# Altium PCB PCB5RECTIFIER.PcbDoc
Units mm, origin at the board's own origin, x right, y up, seen from the top; angles counter-clockwise.
Board outline 152.4 x 101.6 mm, 2 copper layers (Top Layer, Bottom Layer); 20 components, 17 nets, 40 pads, 0 vias.
Unrouted connection lines stored in the file: 33.
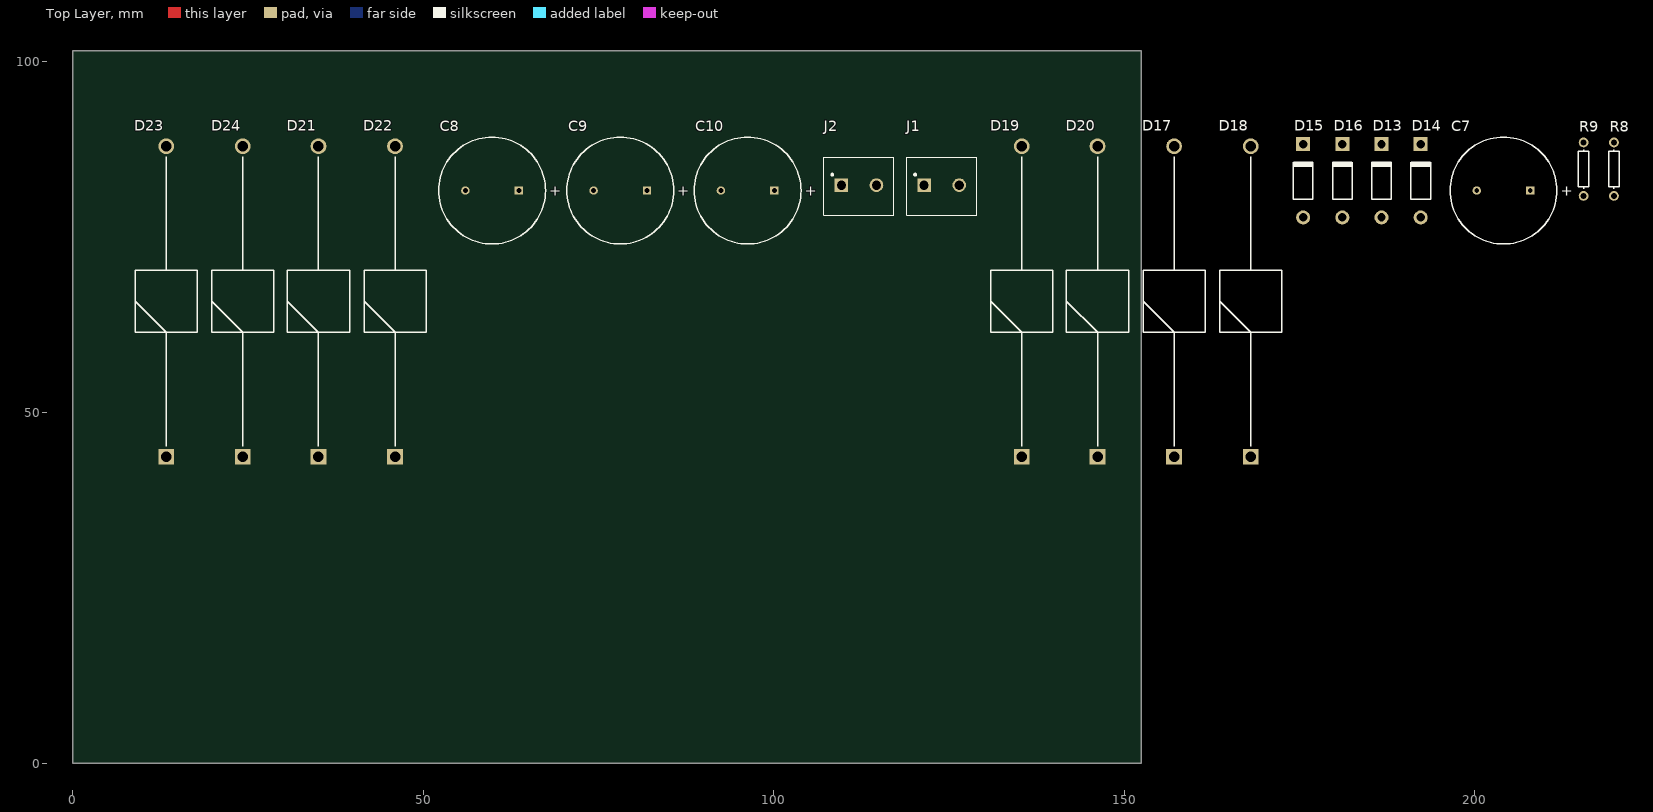
[diagram p0: Top Layer view]
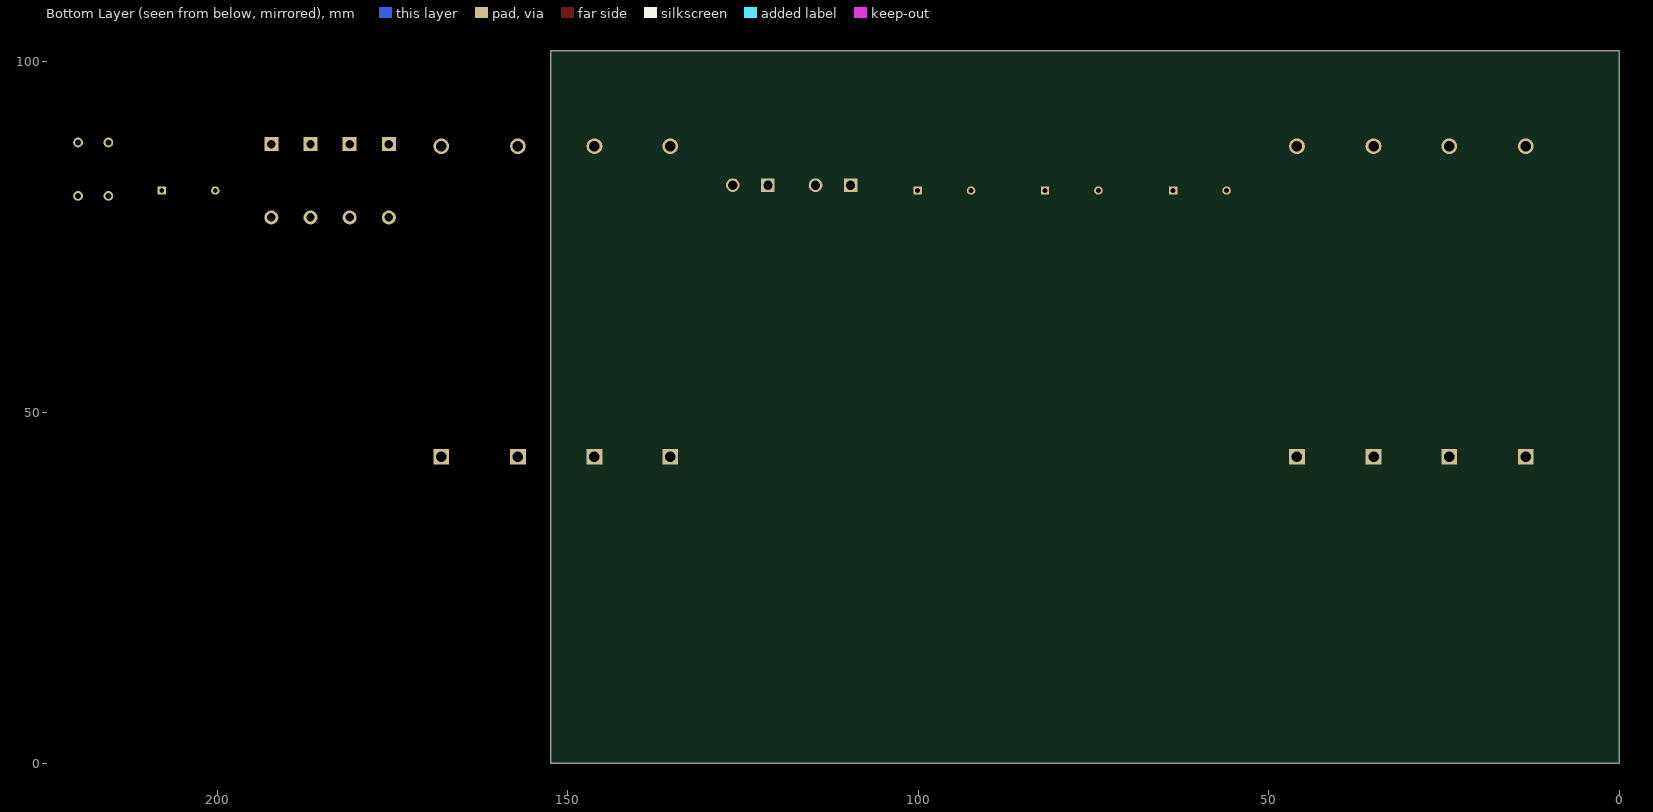
[diagram p1: Bottom Layer view, seen from below]

## Layer stack, top to bottom
Top Solder: solder mask 0.0102, Solder Resist, Dk 3.5
Top Layer: signal copper 0.0356
Dielectric 1: dielectric 0.32, FR-4, Dk 4.8
Bottom Layer: signal copper 0.0356
Bottom Solder: solder mask 0.0102, Solder Resist, Dk 3.5

## Board outline
0,0 152.4,0 152.4,101.6 0,101.6

## Design rules (kind name [scope] priority, off if disabled: settings)
Clearance [All] p1: gap=0.254 ignorepadtopadclearanceinfootprint=FALSE except(0: Arc-Hole Track-Hole SMDPad-Hole THPad-Hole Via-Hole Fill-Hole Poly-Hole Region-Hole Text-Hole)
PolygonConnect [All] p1: connectstyle=Relief reliefconductorwidth=0.254 reliefentries=4 polygonreliefangle="90 Angle" airgapwidth=0.254
RoomDefinition Sheet2 [InComponentClass('Sheet2')] p1: confinementstyle=ConfineIn formatcopy=TRUE lockcomponents=FALSE outline 8.382,42.037 222.25,42.037 222.25,92.075 8.382,92.075
RoutingVias [All] p1: holewidth=0.711 width=1.27 viastyle="Through Hole" minholewidth=0.711 minwidth=1.27 maxholewidth=0.711 maxwidth=1.27
SolderMaskExpansion [All] p1: expansion=0.102
Width [All] p1: maxlimit=0.254 minlimit=0.254 preferedwidth=0.254
30 further rules are at their usual default settings.

## Components (designator, comment, footprint, x,y, rotation, side; value= is the part's Value field where it differs from the comment)
C7 "Cap Pol1" RB7.6-15 204.089,81.661 r0 top value=1mF
C8 "Cap Pol1" RB7.6-15 59.817,81.661 r0 top value=6800uF
C9 "Cap Pol1" RB7.6-15 78.105,81.661 r0 top value=6800uF
C10 "Cap Pol1" RB7.6-15 96.266,81.661 r0 top value=6800uF
D13 "Diode 1N4001" DO-41 186.69,83.058 r90 top
D14 "Diode 1N4001" DO-41 192.278,83.058 r90 top
D15 "Diode 1N4001" DO-41 175.514,83.058 r90 top
D16 "Diode 1N4001" DO-41 181.102,83.058 r90 top
D17 "10A01-T" DIOAD4425W130L885D885 157.099,43.688 r90 top
D18 "10A01-T" DIOAD4425W130L885D885 168.021,43.688 r90 top
D19 "10A01-T" DIOAD4425W130L885D885 135.382,43.688 r90 top
D20 "10A01-T" DIOAD4425W130L885D885 146.177,43.688 r90 top
D21 "10A01-T" DIOAD4425W130L885D885 35.052,43.688 r90 top
D22 "10A01-T" DIOAD4425W130L885D885 45.974,43.688 r90 top
D23 "10A01-T" DIOAD4425W130L885D885 13.335,43.688 r90 top
D24 "10A01-T" DIOAD4425W130L885D885 24.257,43.688 r90 top
J1 "1935161" *PHOENIX_1935161 123.952,82.423 r0 top
J2 "1935161" *PHOENIX_1935161 112.141,82.423 r0 top
R8 "Res1" AXIAL-0.3 219.837,84.709 r90 top value=1K
R9 "Res1" AXIAL-0.3 215.519,84.709 r90 top value=1K

## Footprints (in the part's own frame and the unit in brackets; to place one, negate y for a bottom-side part, rotate by r counter-clockwise, add the part's x,y. Pads: shape width x height; smd on the part's side, far side on the other; paste and mask are expansions set on the pad)
*PHOENIX_1935161 [mm]
  rect 1.95x1.95 hole 1.3: 1(-2.5,0)
  round 1.95 hole 1.3: 2(2.5,0)
  silkscreen extent -5,-4.3 5,4
AXIAL-0.3 [mm] "Axial Device, Thru-Hole; 2 Leads; 0.3 in Pin Spacing"
  round 1.4 hole 0.85: 1(-3.81,0) 2(3.81,0)
  silkscreen extent -2.77,-0.76 2.77,0.76
DIOAD4425W130L885D885 [mm]
  rect 2.25x2.25 hole 1.5: 1(0,0)
  round 2.25 hole 1.5: 2(44.3,0)
  silkscreen extent 1.48,-4.43 42.82,4.43
DO-41 [mm] "Diode, Axial; Body 5.2 x 2.7 mm (LxDia. max), Lead Dia. 0.86 mm (max)"
  round 2 hole 1.2: 1(-5.23,0)
  rect 2x2 hole 1.2: 2(5.23,0)
  silkscreen extent -2.65,-1.4 2.75,1.4
RB7.6-15 [mm] "Polarized Capacitor (Radial); 2 Leads"
  rect 1.2x1.2 hole 0.7: 1(3.81,0)
  round 1.2 hole 0.7: 2(-3.81,0)
  silkscreen extent -7.62,-7.62 7.62,7.62

## Part data
C7 C8 C9 C10: "Polarized Capacitor (Radial)", LatestRevisionDate=17-Jul-2002, LatestRevisionNote="Re-released for DXP Platform.", PackageDescription="Polarized Capacitor (Radial); 2 Leads", PackageReference=RB7.6-15, Published=8-Jun-2000, Publisher="Altium Limited"
D13 D14 D15 D16: "1 Amp General Purpose Rectifier", Code_JEDEC=DO-204-AL, ComponentLink1Description="Manufacturer Link", ComponentLink1URL=http://www.fairchildsemi.com/, ComponentLink2Description=Datasheet, ComponentLink2URL=http://www.fairchildsemi.com/ds/1N%2F1N4001.pdf, DatasheetVersion=1998, LatestRevisionDate=17-Jul-2002, LatestRevisionNote="Re-released for DXP Platform.", PackageDescription="Diode, Axial; Body 5.2 x 2.7 mm (LxDia. max), Lead Dia. 0.86 mm (max)", PackageReference=DO-41, PackageVersion=Aug-1999, Published=8-Jun-2000, Publisher="Altium Limited"
D17 D18 D19 D20 D21 D22 D23 D24: "Diode", Manufacturer_Name="Diodes Inc.", Mouser Part Number=621-10A01-T, RS Part Number=9228248, Allied_Number=70437181, Allied Price/Stock=https://www.alliedelec.com/diodes-inc-10a01-t/70437181/, Datasheet Link=https://componentsearchengine.com/Datasheets/1/10A01-T.pdf, Manufacturer_Part_Number=10A01-T, Mouser Price/Stock=https://www.mouser.com/Search/Refine.aspx?Keyword=621-10A01-T, RS Price/Stock=http://uk.rs-online.com/web/p/products/9228248
J1 J2: "Conn Terminal Blocks 2 POS 5mm Solder ST Thru-Hole 16A", Package=None, Availability=Unavailable, MF="Phoenix Contact", MP=1935161, Price=None, SnapEDA_Link=https://www.snapeda.com/parts/1935161/Phoenix%20Contact/view-part/?ref=snap
R8 R9: "Resistor", LatestRevisionDate=17-Jul-2002, LatestRevisionNote="Re-released for DXP Platform.", PackageDescription="Axial Device, Thru-Hole; 2 Leads; 0.3 in Pin Spacing", PackageReference=AXIAL-0.3, Published=8-Jun-2000, Publisher="Altium Limited"

## Nets (pads, with @x,y where several pads share a name; then routed paths per layer and width w, separated by ;. In a path a pad name is that pad's centre, name@x,y a point inside that pad or via, vN(x,y) a via of type N, cw(c..) or ccw(c..) an arc to the next point about the centre after c; other vN are vias at no path point)
NetC1_1: 
NetC1_2: 
NetC2_1: 
NetC7_1: C7.1 R8.2 R9.2
NetC7_2: C7.2 D14.2 D16.2 R9.1
NetC8_1: C8.1 C9.1 C10.1 D18.1 D20.1 D22.1 D24.1 J2.1
NetC8_2: C8.2 C9.2 C10.2 D17.2 D19.2 D21.2 D23.2 J2.2
NetD13_1: D13.1 D15.1 R8.1
NetD13_2: D13.2 D14.1 D17.1 D18.2 D23.1 D24.2 J1.2
NetD15_2: D15.2 D16.1 D19.1 D20.2 D21.1 D22.2 J1.1
NetJ3_2: 
NetQ1_2: 
NetQ1_3: 
NetQ2_3: 
NetQ3_3: 
NetQ4_3: 
NetR3_1: 

## Text inside footprints (layer, text, board x,y; h text height)
C7: Top Overlay "+" at 212.221,80.924 h1.5
C8: Top Overlay "+" at 67.949,80.924 h1.5
C9: Top Overlay "+" at 86.237,80.924 h1.5
C10: Top Overlay "+" at 104.398,80.924 h1.5
J1: Mechanical 4 "NAME" at 118.865,87.26 h1.88; Mechanical 4 "VALUE" at 118.859,75.807 h1.88; Mechanical 4 "NAME" at 118.865,87.26 h1.88; Mechanical 4 "VALUE" at 118.859,75.807 h1.88
J2: Mechanical 4 "NAME" at 107.054,87.26 h1.88; Mechanical 4 "VALUE" at 107.048,75.807 h1.88; Mechanical 4 "NAME" at 107.054,87.26 h1.88; Mechanical 4 "VALUE" at 107.048,75.807 h1.88